# Altium PCB 3-motors-1-board.pcbdoc (part 2 of 2)
Units mil, origin at the board's own origin, x right, y up, seen from the top; angles counter-clockwise.
Board outline 3965 x 3335 mil, 4 copper layers (Top Layer, GND, PWR, Bottom Layer), stack 37.817 mil thick; 63 components, 69 nets, 278 pads, 85 vias.
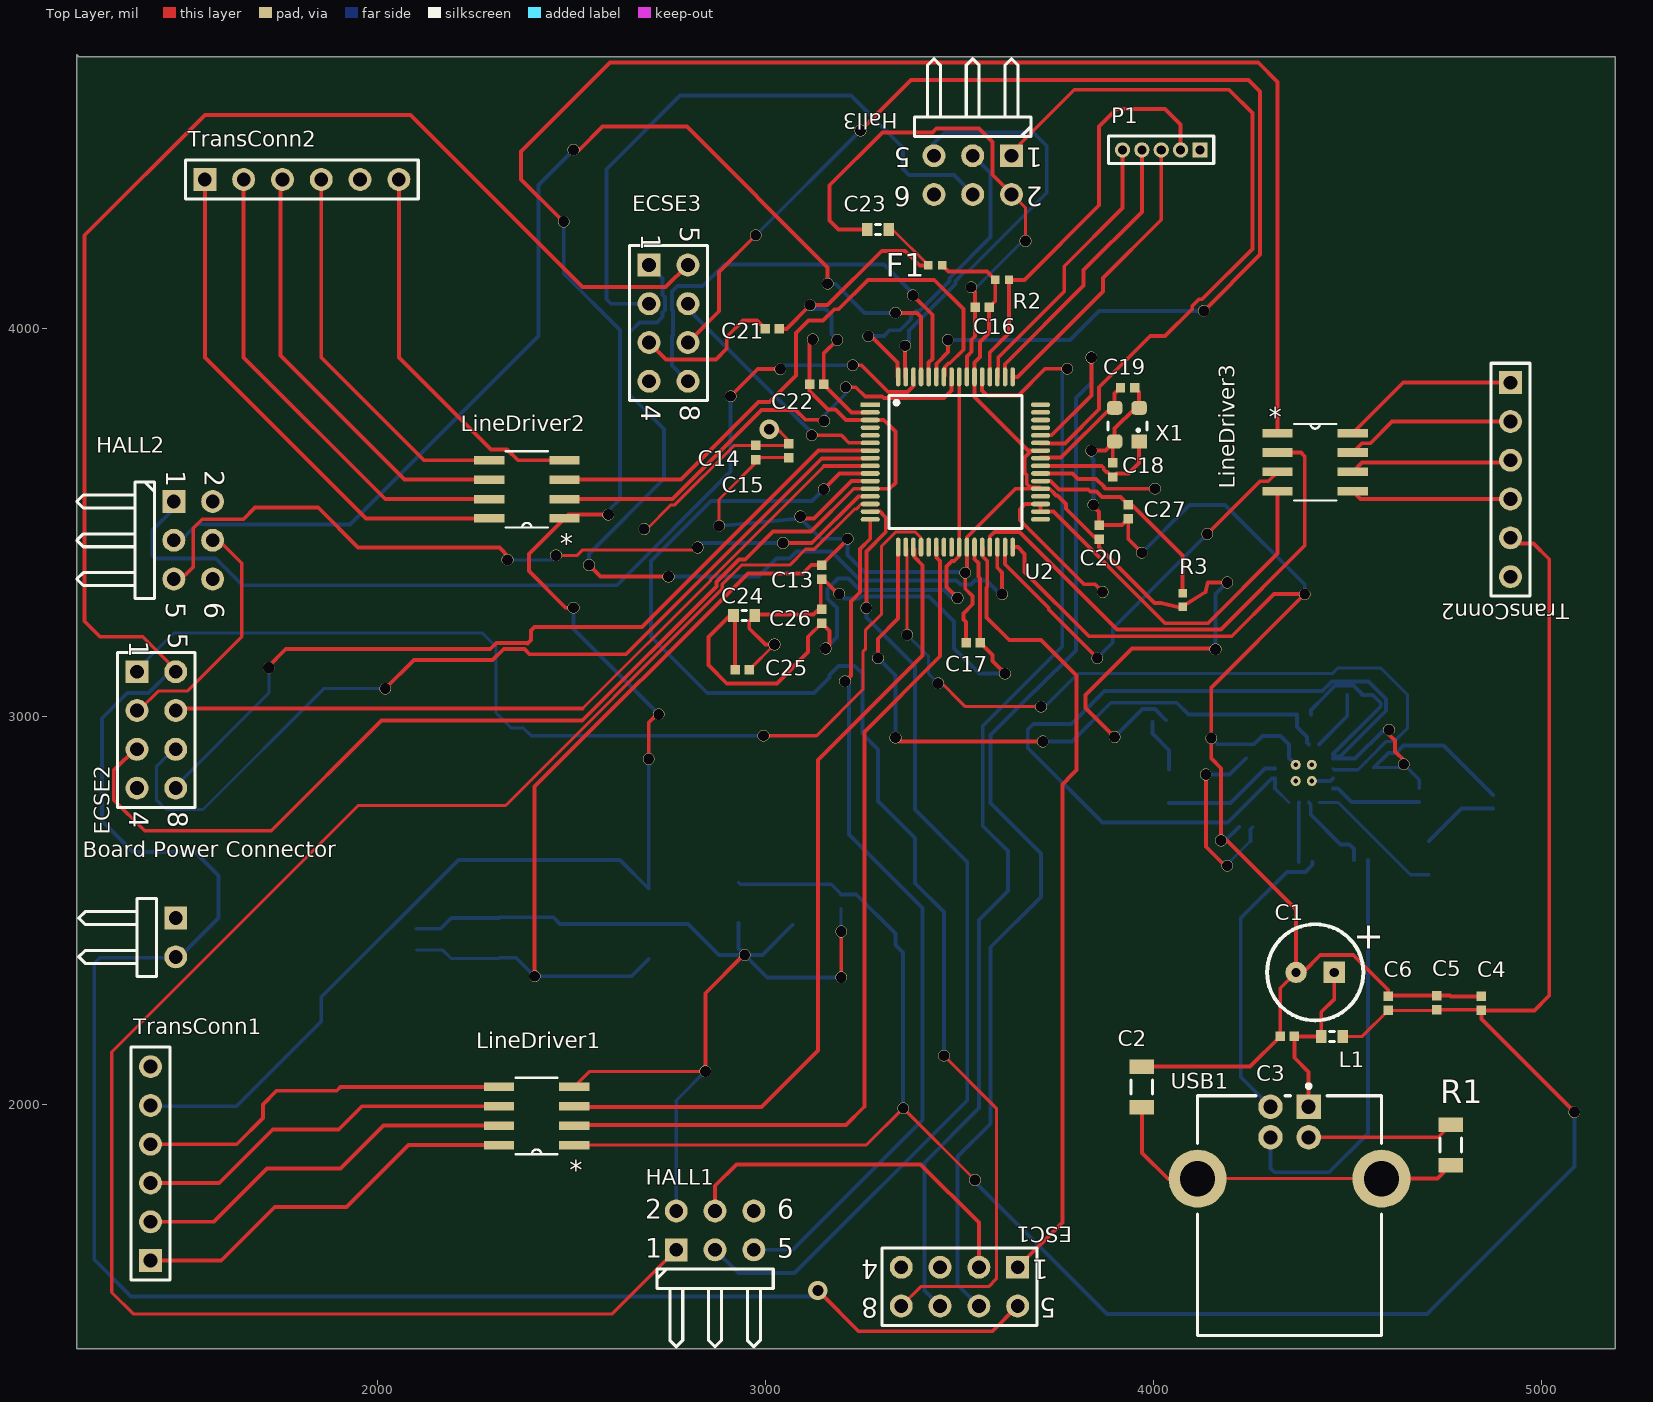
[diagram p0: Top Layer view]

## Via types
v1: diameter 30, hole 28, Top Layer to Bottom Layer, 82 vias
v2: diameter 50, hole 28, Top Layer to Bottom Layer, 2 vias
v3: diameter 30, hole 30, Top Layer to Bottom Layer, 1 vias

## Nets (pads, with @x,y where several pads share a name; then routed paths per layer and width w, separated by ;. In a path a pad name is that pad's centre, name@x,y a point inside that pad or via, vN(x,y) a via of type N, cw(c..) or ccw(c..) an arc to the next point about the centre after c; other vN are vias at no path point) (continued)
H1M2: (continued)
  Top Layer w10: HALL2.5@1475,3335 1525,3385 1525,3484.71 1548.17,3507.87 1654.64,3507.87 1684.66,3537.89 1847.11,3537.89 1950,3435 2314.1,3435 v1@2340.55,3408.55 ; v1(3045,3446.65) 3119.21,3446.65 3239.49,3566.93 U2.13
  Bottom Layer w8: v1(2335,3403.36) 2448.36,3403.36 v1(2460,3415)
  Bottom Layer w10: v1(2825,3435) 2836.65,3446.65 v1(3045,3446.65)
H1M3: Hall3.5 U2.63 | length 1082
  Top Layer w10: U2.63@3360,3875 v1(3360,3955)
  Bottom Layer w10: v1@3370,3965 3370,3994.66 3490,4114.66 3490,4122.43 3513.43,4145.86 3521.2,4145.86 3725,4349.66 3725,4470 3690,4505 3461.98,4505 3430.87,4473.89 Hall3.5@3430.87,4450
H2M1: HALL1.3 U2.15 | length 2536.3
  Top Layer w10: v1(3260,3279.33) 3260,3425 3310,3475 3310,3512.5 3294.94,3527.56 U2.15
  Bottom Layer w10: HALL1.3 2930,1565 3075,1565 3520,2010 3520,2625 3385.47,2759.53 3385.47,3129.53 3260,3255 v1(3260,3279.33)
H2M2: HALL2.3 U2.61 | length 2971.4
  Top Layer w10: v1(2505,4460) 2520,4460 2580,4520 2797.2,4520 3160,4157.2 3160,4130 ; v1(3335,4040) 3390,4040 3400.91,4029.09 U2.61
  Bottom Layer w10: HALL2.3@1475,3435 1535,3495 1557.69,3495 1558.21,3494.47 1929.47,3494.47 2415,3980 2415,4370 v1(2505,4460) ; v1(3160,4115) 3180,4115 3255,4040 v1(3335,4040)
H2M3: Hall3.3 U2.64 | length 805.4
  Top Layer w10: v1(3265,3980) 3271.85,3980 3340,3911.85 U2.64@3340,3875
  Bottom Layer w10: v1(3265,3980) 3305,3980 3320,3995 3346.57,3995 3375,4023.43 3375,4032.75 3387.25,4045 3396.57,4045 3474,4122.43 3474,4129.06 3580,4235.06 3580,4400.87 Hall3.3@3530.87,4450
H3M1: HALL1.1 U2.14 | length 4713
  Top Layer w8: HALL1.1 2605,1460 1370,1460 1315,1515 1315,2135 1950,2770 2330.13,2770 2888.66,3328.53 2888.66,3340.38 2937.97,3389.69 3062.24,3389.69 3103.21,3430.65 3125.84,3430.65 3229.35,3534.17 3233.85,3534.17 3246.93,3547.24 U2.14
H3M2: HALL2.1 U2.62 | length 2543.2
  Top Layer w10: v1(2910,3825) 2980,3895 v1(3038.27,3895) ; v1(3225,3905) 3247.44,3905 3316.4,3836.04 3366.19,3836.04 3381.22,3851.07 U2.62
  Bottom Layer w10: HALL2.1@1475,3535 1420,3480 1420,3415 1428.19,3406.81 1583.19,3406.81 1652.11,3337.89 2616.89,3337.89 2910,3631 v1(2910,3825) ; v1(3038.27,3895) 3048.27,3905 v1(3225,3905)
H3M3: Hall3.1 U2.43 | length 1858.7
  Top Layer w10: Hall3.1@3630.87,4450 3795.87,4615 4194.71,4615 4255,4554.71 4255,4205 4125,4075 4117.57,4075 4100,4057.43 4100,4050 4030,3980 3991.73,3980 3860,3848.27 3860,3791.5 3771.61,3703.11 U2.43@3708.98,3703.11
NetD1_1: D1.1 R13.1 | length 139.4
  Bottom Layer w10: R13.1 3997.28,2955.43 4040,2912.72 D1.1
NetD2_1: D2.1 R14.1 | length 199.8
  Bottom Layer w10: D2.1 4793.98,2762.28 R14.1
NetR6_1: R6.1 U3.16 | length 157.9
  Bottom Layer w10: U3.16 4499.57,3000.86 R6.1
NetR7_1: R7.1 U3.4 | length 236.8
  Bottom Layer w10: U3.4 4475.72,2814.28 4510.43,2779.57 R7.1
NetR8_2: R8.2 U3.7 | length 153
  Bottom Layer w10: R8.2 4374.57,2777.44 U3.7
NetR9_2: R9.2 U3.6 | length 209.6
  Bottom Layer w10: U3.6 4405.27,2773.18 4405.27,2746.93 4482.2,2670 4505,2670 4517.28,2657.72 R9.2
OSC0: C18.2 U2.40 X1.1 | length 338.8
  Top Layer w10: U2.40 3822.76,3645.67 3823.43,3645 3856.57,3645 3857.24,3645.67 3866.22,3645.67 3871.8,3640.09 3871.8,3636.35 3878.24,3629.91 3881.98,3629.91 C18.2 3904.02,3625.91 3935.5,3625.91 3962.99,3653.4 X1.1
OSC1: C19.2 U2.41 X1.3 | length 302.7
  Top Layer w10: U2.41@3708.98,3666.96 3761.96,3666.96 3890,3795 X1.3 3900,3832.4 C19.2
PWM1: ESC1.1 U2.28 | length 2067.8
  Top Layer w10: U2.28@3560,3436.02 3561.17,3434.86 3561.17,3410.32 3571.57,3399.91 3571.57,3333.14 3570,3331.57 3570,3255 3628.28,3196.72 3710,3196.72 3801.33,3105.38 3801.33,2861.33 3778.37,2838.37 3778.37,2837.2 3765.29,2824.13 3765.29,1695.29 ESC1.1
PWM2: ECSE2.1 U2.20 | length 2695.5
  Top Layer w8: v1(2995,2950) 3131.85,2950 3251,3069.15 3251,3166.15 3257.44,3172.6 3257.44,3221.62 3299,3263.18 3299,3438.42 3335.58,3475 3385.91,3475 3400.91,3460 U2.20
  Bottom Layer w8: ECSE2.1@1380,3120 1475,3215 2270,3215 2305,3180 2305,3010 2345.47,2969.53 2376.37,2969.53 2395.9,2950 v1@2985,2950
PWM3: ECSE3.1 U2.30 | length 2254
  Top Layer w10: v1(2545,3390) 2575,3360 v1(2750,3360) ; U2.30@3597.44,3436.02 3597.44,3383.61 3610,3371.05 v1(3610,3315)
  Bottom Layer w10: v1(2545,3390) 2545,3418.9 2738.51,3612.41 2738.51,3740.32 2650,3828.83 2650,3990 2675,4015 2720,4015 2735,4030 2735,4041.25 2740.53,4046.77 2740.53,4080.35 2735,4085.88 2735,4128.56 ECSE3.1 ; v1(2750,3360) 2981.78,3360 3028.43,3406.65 3061.57,3406.65 3079.91,3425 3170,3425 3245,3350 3492.57,3350 3502.57,3340 3529.76,3340 3539.76,3350 3570,3350 v1@3607.5,3312.5
RESET: C27.2 R3.2 U2.38 | length 542.2
  Top Layer w10: U2.38 3734.84,3606.3 3756.14,3585 3832.03,3585 3837.35,3579.68 3852.74,3579.68 3867.43,3565 3915,3565 C27.2 3944.4,3545 4075,3414.4 R3.2
SHIELD: C2.2 R1.2 USB1.5 USB1.6 | length 956
  Top Layer w8: USB1.6 USB1.5
  Top Layer w10: C2.2 3970,1875 4036.69,1808.31 USB1.6 ; USB1.5 4731.69,1808.31 R1.2
TCK: P1.2 R2.2 U2.52 | length 1090.8
  Top Layer w10: U2.52@3578.07,3879.65 3578.07,3938.07 3627.72,3987.72 R2.2 3667.72,4125 3860,4317.28 3860,4520 3905,4565 4030,4565 4070,4525 P1.2
TDI: P1.4 U2.50 | length 731
  Top Layer w10: U2.50 3617.44,3907.44 3820,4110 3820,4150 3970,4300 P1.4
TDO: P1.3 U2.49 | length 751.1
  Top Layer w10: U2.49 3650,3875 3870,4095 3870,4130 4020,4280 P1.3
TMS: P1.5 U2.51 | length 717.5
  Top Layer w10: U2.51@3600,3875 3600,3925 3770,4095 3770,4160 3920,4310 P1.5
"USB RX LED": D2.2 U3.5 | length 360.9
  Bottom Layer w8: U3.5 4476.11,2777.87 4662.28,2591.69 D2.2
"USB TX LED": D1.2 U3.11 | length 309.8
  Bottom Layer w10: D1.2 4199.02,2776.69 4287.8,2865.46 U3.11
USB_RX: R4.1 U2.17 U3.15 | length 1695.4
  Top Layer w10: v1(3290,3150) 3290,3200 3341.85,3251.85 U2.17 ; v1@3345,2935 v1(3715,2935)
  Bottom Layer w10: v1(3290,3150) 3335,3105 v1(3335,2945) ; v1@3720,2935 3790,2935 3890,3035 4060,3035 4090,3005 R4.1 4370.39,2972.47 4395.9,2946.96 4395.9,2932.16 U3.15
USB_TX: R5.1 U2.18 U3.2 | length 2004.4
  Top Layer w8: U2.18 3365,3432.56 v1(3365,3210) ; v1@3445,3095 3515,3025 v1(3710,3025)
  Bottom Layer w8: v1@3375,3200 3420,3155 3420,3110 v1(3445,3085) ; v1(3710,3025) 3720,3025 3805,3110 4460.78,3110 4475.78,3125 4585,3125 4655,3055 4655,2970 4620.49,2935.49 4600.12,2935.49 4553.11,2888.48 4552.75,2888.48 4546.89,2882.62 4546.89,2882.26 R5.1 4526.92,2862.28 4465.77,2862.28 U3.2
VBUS: C1.1 C3.2 L1.1 USB1.1 | length 444.8
  Top Layer w10: USB1.1 4400,2083.11 4363.11,2120 C3.2 L1.1 4432.44,2237.44 4466.1,2271.1 C1.1
VCORE: C24.2 C25.2 C26.2 U2.25 U2.56 | length 1904.7
  Top Layer w10: C25.2 2921.89,3255.55 C24.2 2908.19,3260 2852.73,3204.53 2852.73,3132.27 2900,3085 3029.43,3085 3110,3165.57 3110,3205 C26.2 3165,3220 3165,3185 v1(3155,3175) ; v1(3495,3305) 3466.17,3333.83 3466.17,3386.08 3480.5,3400.42 3486.65,3400.42 3499.33,3413.1 U2.25 U2.56
  Bottom Layer w10: v1(3155,3175) 3184.23,3204.23 3184.23,3279.73 3178.47,3285.5 3177.82,3285.5 3160.25,3303.07 3160.25,3327.93 3187.32,3355 3214.02,3355 3243.69,3325.33 3459.67,3325.33 v1@3480,3305
pads on no net: ECSE2.4 ECSE3.4 ESC1.4 HALL1.6 HALL2.6 Hall3.6 U2.1 U2.4 U2.5 U2.21 U2.23 U2.24 U2.33 U2.36 U2.45 U2.46 U2.47 U2.48 U3.12 U3.14

## Polygon pours and split planes (outlines as drawn)
no net on Bottom Layer "Bottom Layer-No Net" (solid, pour order 38): 4085,2655
+5V on PWR (solid, pour order 73): 1295,3245 1290,3250 1290,4610 2130,4610 2440,4300 2400,4260 2400,3834.75 2269.75,3834.75 1895,3460 1895,3240 1295,3240 1290,3245
+24V on PWR (solid, pour order 71): 1290,2300 1255,2265 1255,1435 1290,1400 3800,1400 3800,1650 3740,1710 3705,1675 3230,1675 3230,1660 2985,1415 1320,1415 1275,1460 1295,1480 1295,2195 1350,2195 1455,2300
+24V on PWR (solid, pour order 69): 1290,2300 1455,2300 1575,2420 1575,3175 1540,3210 1535,3205 1290,3205
+A3.3V on PWR (solid, pour order 67): 2775,3734.16 2849.67,3734.16 2960.5,3845 3072.5,3845 3090,3862.5 3090,3991.98 3112.53,4014.51 3197.2,4014.51 3322.69,4140 3434.07,4140 3434.07,4285.93 3340,4380 3335,4375 2775,4375
+5V on PWR (solid, pour order 65): 1355,2173.52 1355,1550 1465,1550 3080,1550 3080,1715 4755,1715 5095,2055 5095,4545 2680,4545 2400,4265 2400,3433.13 2693.13,3433.13 2790,3530 2760,3560 2760,4395 3535,4395 4230,3700 4225,3695 4225,3465 4440,3465 4945,2960 4945,2485 3363.52,2485 2515,3333.52 2506.48,3325 1805,3095 1805,2623.52
+3.3V on PWR "+3.3V_L03_P060" (solid, pour order 60): 3785,3040 3785,2545 3815,2515 4930,2515 4930,2945 4475,3400 4200,3400 4200,3040
+3.3V on PWR "+3.3V_L03_P058" (solid, pour order 58): 3175,3815 3270,3910 3270,4085 3390,4085 3440,4135 3440,4215 3630,4215 4200,3645 4200,3040 2890,3040 2770,3160 2800,3190 2800,3695 2910,3745 2980,3815
GND on GND (split plane): 5169.9,1390.1 1245.1,1390.1 1245.1,4679.9 5169.9,4679.9

## Text inside footprints (layer, text, board x,y; h text height)
C1: Top Overlay "+" at 4515.35,2401.54 h70
ECSE2: Top Overlay "5" at 1460,3215 h50 r270; Top Overlay "1" at 1360,3195 h50 r270; Top Overlay "4" at 1360,2755 h50 r270; Top Overlay "8" at 1460,2755 h50 r270
ECSE3: Top Overlay "8" at 2780,3803.56 h50 r270; Top Overlay "4" at 2680,3803.56 h50 r270; Top Overlay "1" at 2680,4243.56 h50 r270; Top Overlay "5" at 2780,4263.56 h50 r270
ESC1: Top Overlay "5" at 3750,1500 h50 r180; Top Overlay "1" at 3730,1600 h50 r180; Top Overlay "4" at 3290,1600 h50 r180; Top Overlay "8" at 3290,1500 h50 r180
HALL1: Top Overlay "2" at 2690,1705 h50; Top Overlay "1" at 2690,1605 h50; Top Overlay "5" at 3030,1605 h50; Top Overlay "6" at 3030,1705 h50
HALL2: Top Overlay "6" at 1555,3293.78 h50 r270; Top Overlay "5" at 1455,3293.78 h50 r270; Top Overlay "1" at 1455,3633.78 h50 r270; Top Overlay "2" at 1555,3633.78 h50 r270
Hall3: Top Overlay "6" at 3374.07,4365 h50 r180; Top Overlay "5" at 3374.07,4465 h50 r180; Top Overlay "1" at 3714.07,4465 h50 r180; Top Overlay "2" at 3714.07,4365 h50 r180
LineDriver1: Top Overlay "*" at 2529.5,1878 h50 r180; Mechanical 13 "*" at 2529.5,1878 h50 r180
LineDriver2: Top Overlay "*" at 2504.5,3493 h50 r180; Mechanical 13 "*" at 2504.5,3493 h50 r180
LineDriver3: Top Overlay "*" at 4297.21,3747 h50; Mechanical 13 "*" at 4297.21,3747 h50